# Altium PCB NFC_Access_R00.PcbDoc (part 1 of 2)
Units mm, origin at the board's own origin, x right, y up, seen from the top; angles counter-clockwise.
Board outline 145 x 60 mm, 2 copper layers (Top Layer, Bottom Layer); 109 components, 94 nets, 438 pads, 146 vias.
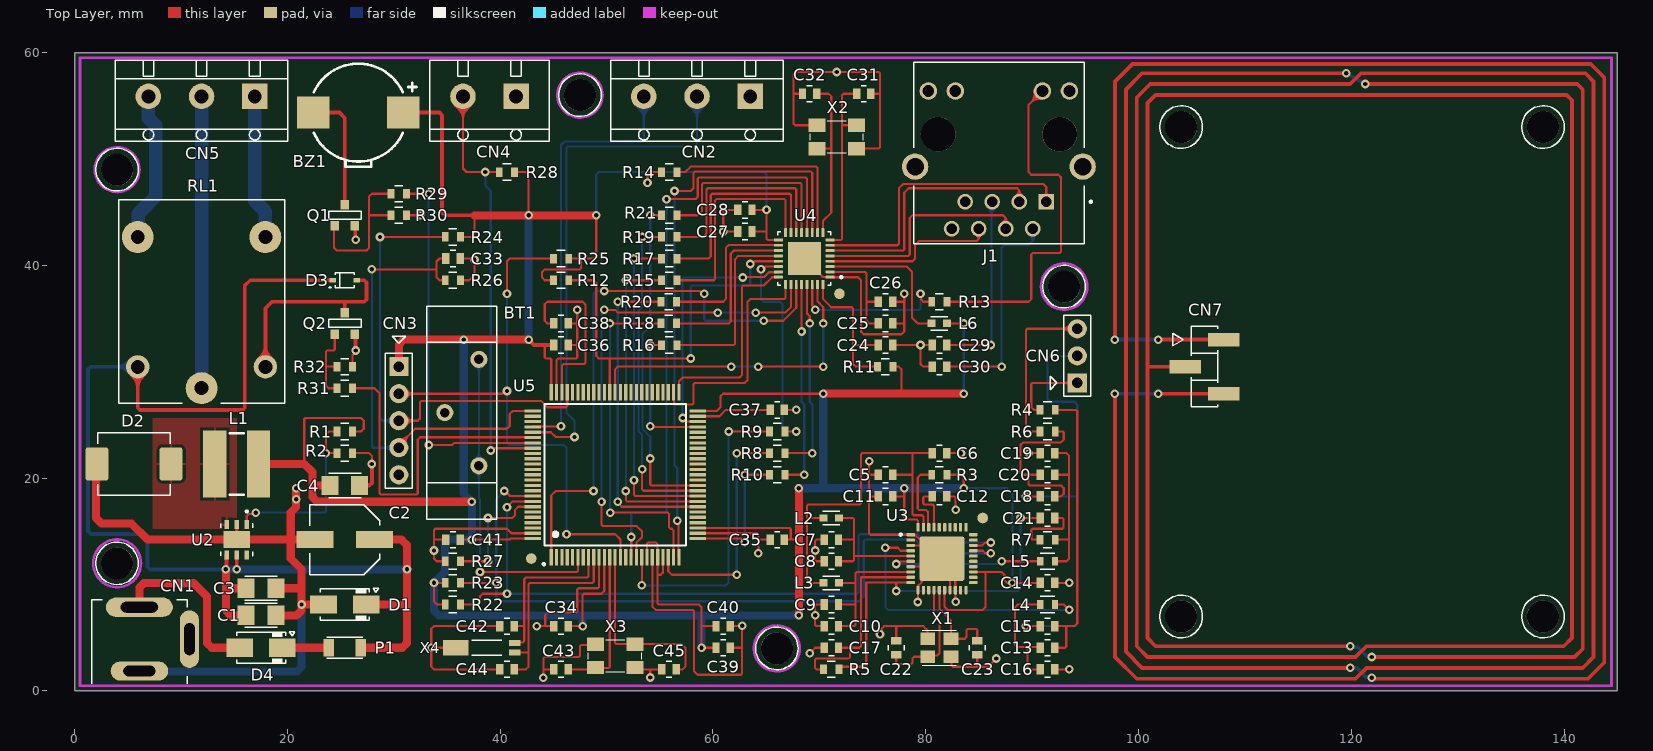
[diagram p0: Top Layer view]
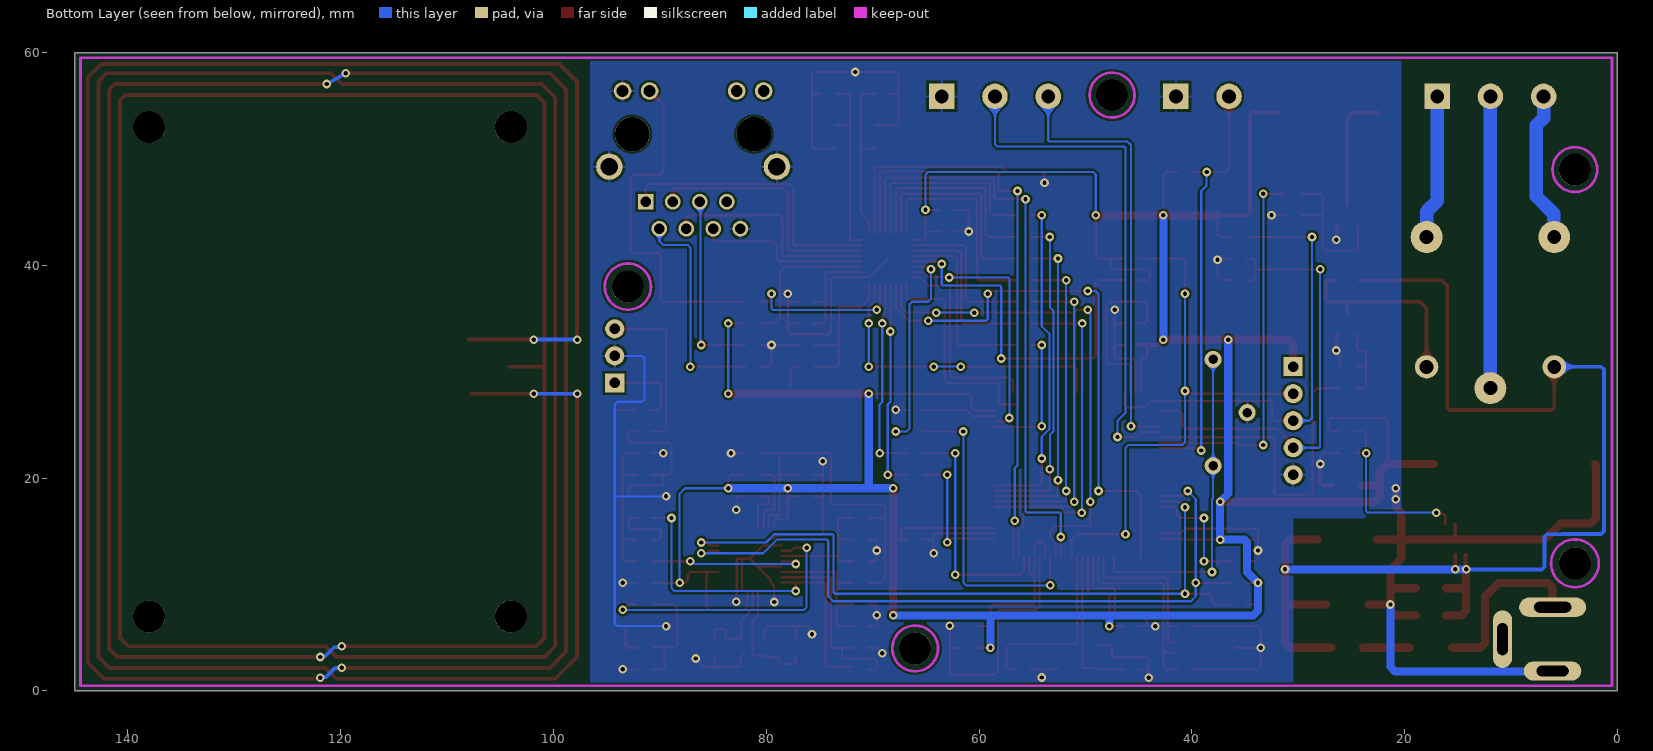
[diagram p1: Bottom Layer view, seen from below]

## Layer stack, top to bottom
Top Solder: solder mask 0.0102, Solder Resist, Dk 3.5
Top Layer: signal copper 0.0356
Dielectric 1: dielectric 0.32, FR-4, Dk 4.8
Bottom Layer: signal copper 0.0356
Bottom Solder: solder mask 0.0102, Solder Resist, Dk 3.5

## Board outline
0,0 0,60 145,60 145,0

## Design rules (kind name [scope] priority, off if disabled: settings)
Clearance [All] p1: gap=0.203 ignorepadtopadclearanceinfootprint=FALSE except(0: Arc-Hole Track-Hole SMDPad-Hole THPad-Hole Via-Hole Fill-Hole Poly-Hole Region-Hole Text-Hole; 0.178: Arc-SMDPad Track-SMDPad SMDPad-SMDPad)
HoleSize [All] p1: absolutevalues=TRUE maxlimit=3.81 minlimit=0.025 maxpercent=80.000 minpercent=20.000
MinimumSolderMaskSliver [All] p1: minsoldermaskwidth=0
PolygonConnect PolygonConnect_1 [All] p1: thpad.connectstyle=Relief thpad.reliefconductorwidth=0.254 thpad.reliefentries=4 thpad.polygonreliefangle="90 Angle" thpad.airgapwidth=0.254 smdpad.connectstyle=Relief smdpad.reliefconductorwidth=0.254 smdpad.reliefentries=4 smdpad.polygonreliefangle="90 Angle" smdpad.airgapwidth=0.254 via.connectstyle=Direct via.reliefconductorwidth=0.254 via.reliefentries=4 via.polygonreliefangle="90 Angle" via.airgapwidth=0.254
RoutingVias [All] p1: holewidth=0.406 width=0.813 viastyle="Through Hole" minholewidth=0.406 minwidth=0.813 maxholewidth=0.711 maxwidth=1.27
SilkToSolderMaskClearance [IsPad] p1: minsilkscreentomaskgap=0.076 clearancetoexposedcopper=TRUE
SolderMaskExpansion [All] p1: expansion=0.102 istentingtop=FALSE
Width [All] p1: maxlimit=1.27 minlimit=0.203 preferedwidth=0.203
27 further rules are at their usual default settings.

## Classes and differential pairs
component class Designator: BZ1 CN4 CN5 D3 Q1 Q2 R28 R29 R30 R31 R32 RL1

## Components (designator, comment, footprint, x,y, rotation, side; value= is the part's Value field where it differs from the comment)
BT1 "S8401-46" S8401-46 34.798,26.162 r90 top locked
BZ1 "SMTB-0927-TW-R" SMTB-0927-TW-R 26.67,54.356 r270 top
C1 "100nF 50V C0G" C_1206 17.526,7.112 r0 top
C2 "100uF 25V Elect" CAP_ELECT_6.3_7.7 25.4,14.224 r180 top
C3 "10uF 25V X5R" C_1206 17.526,9.652 r0 top
C4 "22uF 6.3V X5R" C_1206 25.4,19.304 r0 top
C5 "100nF 25V X7R" C_0603 76.2,20.32 r180 top
C6 "100nF 25V X7R" C_0603 81.28,22.352 r0 top
C7 "10uF 6.3V X5R" C_0603 71.12,14.224 r0 top
C8 "100nF 25V X7R" C_0603 71.12,12.192 r180 top
C9 "10uF 6.3V X5R" C_0603 71.12,8.128 r0 top
C10 "100nF 25V X7R" C_0603 71.12,6.096 r180 top
C11 "100nF 25V X7R" C_0603 76.2,18.288 r180 top
C12 "10uF 6.3V X5R" C_0603 81.28,18.288 r0 top
C13 "22pF 50V C0G" C_0603 91.44,4.064 r180 top
C14 "100nF 25V X7R" C_0603 91.44,10.16 r0 top
C15 "100pF 50V X7R" C_0603 91.44,6.096 r180 top
C16 "220pF 50V X7R" C_0603 91.44,2.032 r0 top
C17 "100nF 25V X7R" C_0603 71.12,4.064 r180 top
C18 "100pF 50V X7R" C_0603 91.44,18.288 r0 top
C19 "220pF 50V X7R" C_0603 91.44,22.352 r0 top
C20 "22pF 50V C0G" C_0603 91.44,20.32 r0 top
C21 "1000pF 50V X7R" C_0603 91.44,16.256 r0 top
C22 "33pF 50V C0G" C_0603 77.216,4.064 r90 top
C23 "33pF 50V C0G" C_0603 84.836,4.064 r270 top
C24 "100nF 50V X7R" C_0603 76.2,32.512 r0 top
C25 "100nF 50V X7R" C_0603 76.2,34.544 r0 top
C26 "2.2uF 6.3V X5R" C_0603 76.2,36.576 r0 top
C27 "100nF 50V X7R" C_0603 62.992,43.18 r180 top
C28 "22uF 6.3V X5R" C_0603 62.992,45.212 r180 top
C29 "100nF 50V X7R" C_0603 81.28,32.512 r180 top
C30 "100nF 50V X7R" C_0603 81.28,30.48 r180 top
C31 "22pF 100V C0G" C_0603 74.168,56.134 r0 top
C32 "22pF 100V C0G" C_0603 69.088,56.134 r180 top
C33 "100nF 50V X7R" C_0603 35.56,40.64 r0 top
C34 "100nF 50V X7R" C_0603 45.72,6.096 r180 top
C35 "100nF 50V X7R" C_0603 66.04,14.224 r180 top
C36 "100nF 50V X7R" C_0603 45.72,32.512 r0 top
C37 "2.2uF 6V3 X5R" C_0603 66.04,26.416 r0 top
C38 "2.2uF 6V3 X5R" C_0603 45.72,34.544 r0 top
C39 "100nF 50V X7R" C_0603 60.96,4.064 r180 top
C40 "10uF 25V X5R" C_0603 60.96,6.096 r0 top
C41 "100nF 50V X7R" C_0603 35.56,14.224 r180 top
C42 "4.7pF 50V C0G" C_0603 40.64,6.096 r180 top
C43 "22pF 50V C0G" C_0603 45.72,2.032 r180 top
C44 "4.7pF 50V C0G" C_0603 40.64,2.032 r180 top
C45 "22pf 50V C0G" C_0603 55.88,2.032 r180 top
CN1 "PJ-002BH" PJ002B 6.096,7.874 r270 top
CN2 "OSTTC030162 Bornera 3Vias 5mm" TERMINALBLOCK_1X3_P5MM 58.5,55.88 r180 top
CN3 "TSW-105-07-F-S" "HEADER_M_1X5_0.1\"" 30.48,25.4 r270 top
CN4 "OSTTC020162 Bornera 2Vias 5mm" TERMINALBLOCK_1X2_P5MM 39,55.88 r180 top
CN5 "OSTTC030162 Bornera 3Vias 5mm" TERMINALBLOCK_1X3_P5MM 11.938,55.88 r180 top
CN6 "TSW-103-07-F-S" HEADER_M_1X3_0.1 94.234,31.496 r90 top
CN7 "TSM-103-01-L-SV-P-TR" "HEADER_M_1X3_0.1\"_SMD" 107.994,33.02 r270 top
D1 "SMAJ30A" D_SMA 25.4,8.128 r0 top
D2 "STPS3L40" D_214 5.588,21.336 r0 top
D3 "1N4148WS" SOD_323 25.4,38.608 r180 top
D4 "S1G" D_SMA 17.526,4.064 r0 top
J1 "ARJC02-111008B" ARJC02-111008B 86.869,52.326 r180 top
L1 "744053003" 744053003 15.24,21.336 r0 top
L2 "HZ0603A252R-10" F_0603 71.12,16.256 r0 top
L3 "HZ0603A252R-10" F_0603 71.12,10.16 r0 top
L4 "560nH" I_0603 91.44,8.128 r0 top
L5 "560nH" I_0603 91.44,12.192 r180 top
L6 "HZ0603A252R-10" F_0603 81.28,34.544 r180 top
P1 "NANOSMDC012F-2" NANOSMDC 25.4,4.064 r0 top
Q1 "IRLML0040TRPBF" SOT_23 25.4,44.704 r90 top
Q2 "IRLML0040TRPBF" SOT_23 25.4,34.544 r90 top
R1 "40K2 1%" R_0603 25.4,24.384 r0 top
R2 "13K 1%" R_0603 25.4,22.352 r180 top
R3 "10K 5%" R_0603 81.28,20.32 r180 top
R4 "1.5 5%" R_0603 91.44,26.416 r0 top
R5 "10K 5%" R_0603 71.12,2.032 r0 top
R6 "1.5 5%" R_0603 91.44,24.384 r0 top
R7 "1K69 1%" R_0603 91.44,14.224 r0 top
R8 "33 5%" R_0603 66.04,22.352 r180 top
R9 "33 5%" R_0603 66.04,24.384 r180 top
R10 "33 5%" R_0603 66.04,20.32 r180 top
R11 "10K 5%" R_0603 76.2,30.48 r180 top
R12 "4K7 5%" R_0603 45.72,38.608 r0 top
R13 "330 5%" R_0603 81.28,36.576 r0 top
R14 "6K49 1%" R_0603 55.88,48.768 r180 top
R15 "33 5%" R_0603 55.88,38.608 r180 top
R16 "33 5%" R_0603 55.88,32.512 r180 top
R17 "33 5%" R_0603 55.88,40.64 r180 top
R18 "33 5%" R_0603 55.843,34.544 r180 top
R19 "33 5%" R_0603 55.88,42.672 r180 top
R20 "33 5%" R_0603 55.843,36.576 r180 top
R21 "33 5%" R_0603 55.88,44.704 r180 top
R22 "10K 5%" R_0603 35.56,8.128 r180 top
R23 "10K 5%" R_0603 35.56,10.16 r180 top
R24 "10K 5%" R_0603 35.56,42.672 r180 top
R25 "10K 5%" R_0603 45.72,40.64 r180 top
R26 "10K 5%" R_0603 35.56,38.608 r0 top
R27 "10K 5%" R_0603 35.56,12.192 r0 top
R28 "10K 5%" R_0603 40.64,48.768 r0 top
R29 "1K 5%" R_0603 30.48,46.736 r0 top
R30 "10K 5%" R_0603 30.48,44.704 r180 top
R31 "1K 5%" R_0603 25.4,28.448 r0 top
R32 "10K 5%" R_0603 25.4,30.48 r180 top
RL1 "G5LE-1A4 DC12" G5LE-1 11.938,35.56 r90 top
U2 "ST1S03APUR" 6-VDFN 15.24,14.224 r270 top
U3 "PN5321A3HN" QFN40G-0.5-6X6MM 81.522,12.434 r0 top
U4 "KSZ8091MNX" QFN32 68.58,40.64 r180 top
U5 "STM32F407VGT6" LQFP100 50.8,20.32 r90 top locked
X1 "7M-27.120MAAJ-T" 7M-4-SMD 81.28,4.064 r180 top
X2 "ABM3C-25.000MHZ-D4Y-T" ABM3C 71.628,52.07 r0 top
X3 "ECS-80-10-30B-CKM-TR" ABM3C 50.8,3.302 r0 top
X4 "AB26TRQ-32.768KHZ-T" AB26TQF 38.608,4.064 r0 top

## Footprints (in the part's own frame and the unit in brackets; to place one, negate y for a bottom-side part, rotate by r counter-clockwise, add the part's x,y. Pads: shape width x height; smd on the part's side, far side on the other; paste and mask are expansions set on the pad)
6-VDFN [mm]
  rect 0.84x0.42 smd: 1(-1.435,0.95) 2(-1.435,0) 3(-1.435,-0.95) 4(1.435,-0.95) 5(1.435,0) 6(1.435,0.95)
  rect 1.6x2.5 smd paste-2: 7(0,0)
  silkscreen extent -2.75,-1.5 1.5,1.5, body extent -1.5,-1.5 1.5,1.5, height 0.54
7M-4-SMD [mm]
  rect 1.4x1.2 smd: 1(-1.1,-0.85) 2(1.1,-0.85) 3(1.1,0.85) 4(-1.1,0.85)
  silkscreen extent -1.6,-1.65 1.6,1.65
744053003 [mm]
  rect 2.2x6.3 smd: 1(-2.05,0) 2(2.05,0)
  silkscreen extent -0.64,-2.9 0.64,2.9
AB26TQF [mm]
  rect 1.1x0.6 smd: 1(2.775,-0.45) 2(2.775,0.45)
  rect 2.4x1.5 smd: 3(-2.775,0)
  silkscreen extent -1.3,-0.73 1.55,0.72, body extent -3.88,-0.68 2.83,0.78, height 1.53
ABM3C [mm]
  rect 1.6x1.25 smd: 1(-1.85,-1.1) 2(1.85,-1.1) 3(1.85,1.1) 4(-1.85,1.1)
  silkscreen extent -2.5,-1.5 2.5,1.5, body extent -2.5,-1.6 2.5,1.6, height 1.3
ARJC02-111008B [mm] "CONN JACK 1PORT 100 BASE-TX PCB"
  rect 1.478x1.478 hole 0.97: 1(-4.445,6.35)
  round 1.478 hole 0.97: 2(-3.175,8.89) 3(-1.905,6.35) 4(-0.635,8.89) 5(0.635,6.35) 6(1.905,8.89) 7(3.175,6.35) 8(4.445,8.89)
  round 1.65 hole 1.1: 9(6.63,-4.06) 10(4.09,-4.06) 11(-4.09,-4.06) 12(-6.63,-4.06)
  round 2.475 hole 1.65: 13(-7.875,3.05) 14(7.875,3.05)
  round 3.26 hole 3.26 unplated: ""(-5.715,0) ""(5.715,0)
  silkscreen extent -8.74,-6.78 8,10.3
C_0603 [mm] "Chip Capacitor, 2-Leads, Body 2.00x1.25mm"
  rect 0.7x1 smd: 1(-0.675,0) 2(0.675,0)
  silkscreen extent -0.25,-0.76 0.25,0.76
C_1206 [mm]
  rect 1.6x1.8 smd: 1(-1.4,0) 2(1.4,0)
  silkscreen extent -1.52,-1.14 1.52,1.14, body extent -1.6,-0.8 1.6,0.8, height 1
CAP_ELECT_6.3_7.7 [mm]
  rect 3.5x1.6 smd: 1(-2.8,0) 2(2.8,0)
  silkscreen extent -3.3,-3.3 3.3,3.3
D_214 [mm]
  rrect25% 2.18x3.12 smd: 1(-3.485,0) 2(3.485,0)
  silkscreen extent -3.43,-2.95 3.43,2.95, body extent -3.97,-2.95 3.97,2.95, height 1.21
D_SMA [mm]
  rect 2.5x1.7 smd: 1(-2,0) 2(2,0)
  silkscreen extent -2.3,-1.52 3.17,1.52, body extent -2.74,-1.4 2.74,1.4, height 2.39
F_0603 [mm] "Ferrite Bead"
  rect 0.75x0.7 smd: 1(-0.725,0) 2(0.725,0)
  silkscreen extent -0.8,-0.64 0.8,0.64
G5LE-1 [mm]
  round 2.2 hole 1.3: 1(-5.1,6) 2(-5.1,-6)
  round 3 hole 1.3: 3(-7.1,0) 4(7.1,6) 5(7.1,-6)
  silkscreen extent -8.5,-7.8 10.6,7.8, body extent -8.5,-7.75 10.5,7.75, height 15.3
HEADER_M_1X3_0.1 [mm] "Header Male 1 x 3 Vias Pitch 100mils"
  rect 1.8x1.8 hole 1: 1(-2.54,0)
  round 1.8 hole 1: 2(0,0) 3(2.54,0)
  silkscreen extent -3.81,-1.27 3.81,2.54
"HEADER_M_1X3_0.1\"_SMD" [mm]
  rect 1.27x2.96 smd: 1(0,0) 2(2.54,-3.6) 3(5.08,0)
  silkscreen extent -1.25,-4.78 6.33,-0.55
"HEADER_M_1X5_0.1\"" [mm] "Header Male 1 x 5 Vias Pitch 100mils"
  rect 1.8x1.8 hole 1: 1(-5.08,0)
  round 1.8 hole 1: 2(-2.54,0) 3(0,0) 4(2.54,0) 5(5.08,0)
  silkscreen extent -7.94,-1.27 6.35,1.27, body extent -6.35,-1.27 6.35,1.27, height 8.87
I_0603 [mm]
  rect 0.6x0.8 smd: 1(-0.7,0) 2(0.7,0)
  silkscreen extent -0.7,-0.76 0.7,0.76
LQFP100 [mm]
  rect 1.55x0.3 smd: 1(-7.75,6) 2(-7.75,5.5) 3(-7.75,5) 4(-7.75,4.5) 5(-7.75,4) 6(-7.75,3.5) 7(-7.75,3) 8(-7.75,2.5) 9(-7.75,2) 10(-7.75,1.5) 11(-7.75,1) 12(-7.75,0.5) 13(-7.75,0) 14(-7.75,-0.5) 15(-7.75,-1) 16(-7.75,-1.5) 17(-7.75,-2) 18(-7.75,-2.5) 19(-7.75,-3) 20(-7.75,-3.5) 21(-7.75,-4) 22(-7.75,-4.5) 23(-7.75,-5) 24(-7.75,-5.5) 25(-7.75,-6) 51(7.75,-6) 52(7.75,-5.5) 53(7.75,-5) 54(7.75,-4.5) 55(7.75,-4) 56(7.75,-3.5) 57(7.75,-3) 58(7.75,-2.5) 59(7.75,-2) 60(7.75,-1.5) 61(7.75,-1) 62(7.75,-0.5) 63(7.75,0) 64(7.75,0.5) 65(7.75,1) 66(7.75,1.5) 67(7.75,2) 68(7.75,2.5) 69(7.75,3) 70(7.75,3.5) 71(7.75,4) 72(7.75,4.5) 73(7.75,5) 74(7.75,5.5) 75(7.75,6)
  rect 0.3x1.55 smd: 26(-6,-7.75) 27(-5.5,-7.75) 28(-5,-7.75) 29(-4.5,-7.75) 30(-4,-7.75) 31(-3.5,-7.75) 32(-3,-7.75) 33(-2.5,-7.75) 34(-2,-7.75) 35(-1.5,-7.75) 36(-1,-7.75) 37(-0.5,-7.75) 38(0,-7.75) 39(0.5,-7.75) 40(1,-7.75) 41(1.5,-7.75) 42(2,-7.75) 43(2.5,-7.75) 44(3,-7.75) 45(3.5,-7.75) 46(4,-7.75) 47(4.5,-7.75) 48(5,-7.75) 49(5.5,-7.75) 50(6,-7.75) 76(6,7.75) 77(5.5,7.75) 78(5,7.75) 79(4.5,7.75) 80(4,7.75) 81(3.5,7.75) 82(3,7.75) 83(2.5,7.75) 84(2,7.75) 85(1.5,7.75) 86(1,7.75) 87(0.5,7.75) 88(0,7.75) 89(-0.5,7.75) 90(-1,7.75) 91(-1.5,7.75) 92(-2,7.75) 93(-2.5,7.75) 94(-3,7.75) 95(-3.5,7.75) 96(-4,7.75) 97(-4.5,7.75) 98(-5,7.75) 99(-5.5,7.75) 100(-6,7.75)
  silkscreen extent -8.54,-6.65 6.65,6.84
NANOSMDC [mm]
  rect 1x1.6 smd: 1(-1.5,0) 2(1.5,0)
  silkscreen extent -1.7,-1 1.7,1, body extent -1.6,-0.8 1.6,0.8, height 1
PJ002B [mm]
  oval 1.8x6.3 hole 1 slot 3.5 at 90 deg: 1(0,0)
  oval 1.8x5.4 hole 1 slot 3 at 90 deg: 2(6,0)
  oval 5.4x1.8 hole 1 slot 3 at 0 deg: 3(3,4.7)
  silkscreen extent -0.7,-4.5 7.2,4.5, body extent -0.7,-4.7 13.7,4.7, height 11.05
QFN32 [mm]
  rrect25% 0.84x0.27 smd: 1(-2.435,1.75) 2(-2.435,1.25) 3(-2.435,0.75) 4(-2.435,0.25) 5(-2.435,-0.25) 6(-2.435,-0.75) 7(-2.435,-1.25) 8(-2.435,-1.75) 17(2.435,-1.75) 18(2.435,-1.25) 19(2.435,-0.75) 20(2.435,-0.25) 21(2.435,0.25) 22(2.435,0.75) 23(2.435,1.25) 24(2.435,1.75)
  rrect25% 0.27x0.84 smd: 9(-1.75,-2.435) 10(-1.25,-2.435) 11(-0.75,-2.435) 12(-0.25,-2.435) 13(0.25,-2.435) 14(0.75,-2.435) 15(1.25,-2.435) 16(1.75,-2.435) 25(1.75,2.435) 26(1.25,2.435) 27(0.75,2.435) 28(0.25,2.435) 29(-0.25,2.435) 30(-0.75,2.435) 31(-1.25,2.435) 32(-1.75,2.435)
  rect 3.1x3.1 smd paste-0.57: 33(0,0)
  silkscreen extent -3.57,-2.5 2.5,2.5, body extent -2.5,-2.5 2.5,2.5, height 0.8
QFN40G-0.5-6X6MM [mm]
  rrect50% 0.8x0.3 smd: 1(-2.95,2.25) 2(-2.95,1.75) 3(-2.95,1.25) 4(-2.95,0.75) 5(-2.95,0.25) 6(-2.95,-0.25) 7(-2.95,-0.75) 8(-2.95,-1.25) 9(-2.95,-1.75) 10(-2.95,-2.25) 21(2.95,-2.25) 22(2.95,-1.75) 23(2.95,-1.25) 24(2.95,-0.75) 25(2.95,-0.25) 26(2.95,0.25) 27(2.95,0.75) 28(2.95,1.25) 29(2.95,1.75) 30(2.95,2.25)
  rrect50% 0.3x0.8 smd: 11(-2.25,-2.95) 12(-1.75,-2.95) 13(-1.25,-2.95) 14(-0.75,-2.95) 15(-0.25,-2.95) 16(0.25,-2.95) 17(0.75,-2.95) 18(1.25,-2.95) 19(1.75,-2.95) 20(2.25,-2.95) 31(2.25,2.95) 32(1.75,2.95) 33(1.25,2.95) 34(0.75,2.95) 35(0.25,2.95) 36(-0.25,2.95) 37(-0.75,2.95) 38(-1.25,2.95) 39(-1.75,2.95) 40(-2.25,2.95)
  rrect10% 4.2x4.2 smd: 41(0,0)
  silkscreen extent -3.96,2.18 -3.81,2.34
R_0603 [mm] "Chip Resistor, 2-Leads, Body 2.00x1.25mm, IPC Low Density"
  rect 0.65x0.9 smd: 1(-0.725,0) 2(0.725,0)
  silkscreen extent -0.38,-0.76 0.38,0.76
S8401-46 [mm]
  round 1.6 hole 0.9: 1(0,0) 2(-5,-3.2) 2(5,-3.2)
  silkscreen extent -10,-4.9 10,1.7
SMTB-0927-TW-R [mm] "3V3 Active Buzzer"
  rect 3x3.05 smd: 1(0,4.225) 2(0,-4.225)
  silkscreen extent -4.6,-4.19 5.1,5.46
SOD_323 [mm]
  rect 0.59x0.45 smd: 1(-1.125,0) 2(1.125,0)
  silkscreen extent -0.9,-0.7 1.51,0.72, body extent -1.28,-0.63 1.23,0.63, height 0.9
SOT_23 [mm]
  rect 0.9x0.8 smd: 1(-1,0.95) 2(-1,-0.95) 3(1,0)
  silkscreen extent -0.38,-1.52 0.38,1.52, body extent -1.19,-1.48 1.31,1.52, height 1.09
TERMINALBLOCK_1X2_P5MM [mm]
  rect 2.4x2.4 hole 1.3: 1(-2.5,0)
  round 2.4 hole 1.3: 2(2.5,0)
  silkscreen extent -5.6,-3.4 5.6,4.2
TERMINALBLOCK_1X3_P5MM [mm]
  rect 2.4x2.4 hole 1.3: 1(-5,0)
  round 2.4 hole 1.3: 2(0,0) 3(5,0)
  silkscreen extent -8.1,-3.4 8.1,4.2, body extent -8.08,-3.43 7.43,4.18, height 10

## Part data
BT1: library part CR2032, "BATT HLDR COIN 20MM 1 CEL PC PIN / 952-1743-2-ND"
BZ1: library part Buzzer, "3V3 Active Buzzer / 668-SMTB-0927-TW-RTR-ND"
C1: library part "Ceramic capacitor", "Ceramic Capacitor / MNF: GRM31C5C1H104JA01L / DGK: 490-6505-2-ND"
C2: library part "Pol capacitor", "Polarized Capacitor / 732-8438-2-ND"
C3: library part "Ceramic capacitor", "Ceramic Capacitor / MNF:GRM31CR61E106KA12L / DGK:490-3373-2-ND"
C4: library part "Ceramic capacitor", "Ceramic Capacitor / MNF: GRM31CR60J226KE19L / DGK: 490-1824-2-ND"
C5 C6 C8 C10 C11 C14 C17 C21 C24 C25 C27 C29 C30 C33 C34 C35 C36 C39 C41: library part "Ceramic capacitor", "Ceramic Capacitor / 1276-1018-2-ND"
C7 C9 C12: library part "Ceramic capacitor", "Ceramic Capacitor / 1276-1119-2-ND"
C13 C20 C43 C45: library part "Ceramic capacitor", "Ceramic Capacitor / 1276-2228-2-ND"
C15 C18: library part "Ceramic capacitor", "Ceramic Capacitor / 1276-1908-2-ND"
C16 C19: library part "Ceramic capacitor", "Ceramic Capacitor / 1276-1986-2-ND"
C22 C23: library part "Ceramic capacitor", "Ceramic Capacitor / 1276-1070-2-ND"
C26 C37 C38: library part "Ceramic capacitor", "Ceramic Capacitor / 1276-1183-2-ND"
C28: library part "Ceramic capacitor", "Ceramic Capacitor / 1276-1193-2-ND"
C31 C32: library part "Ceramic capacitor", "Ceramic Capacitor / 490-4942-2-ND"
C40: library part "Ceramic capacitor", "Ceramic Capacitor / MNF:GRM31CR61E106KA12L / DGK:1276-1869-2-ND"
C42 C44: library part "Ceramic capacitor", "Ceramic Capacitor / 1276-1792-2-ND"
CN1: library part CN_PowerJack, "Barrel Power Connector / CP-002BH-ND"
CN2 CN5: library part CONN_03P, "TERM BLK 3POS SIDE ENTRY 5MM PCB / ED2601-ND"
CN3: library part CONN_05P, "CONN HEADER VERT 5POS 2.54MM / SAM10336-ND"
CN4: library part CONN_02P, "TERM BLK 2POS SIDE ENTRY 5MM PCB / ED2600-ND"
CN6: library part CONN_03P, "CONN HEADER VERT 3POS 2.54MM / SAM8995-ND"
CN7: library part CONN_03P, "CONN HEADER SMD 3POS 2.54MM / SAM13281TR-ND"
D1: library part DIODE_TVS, "Unidirectional TVS / SMAJ30ABTR-ND"
D2: library part DIODO_SH, "Diode Shottky / 497-4673-2-ND"
D3: library part DIODO_SH, "DIODE GEN PURP 75V 300MA SOD323 / 1655-1N4148WSTR-ND"
D4: library part DIODO_SH, "Diode Shottky / 1655-S1GTR-ND"
J1: library part SI-46001-F, "RJ45 with Magentics / 535-12605-ND"
L1: library part IND, "FIXED IND 3UH 2.8A 30 MOHM SMD / 732-1037-2-ND"
L2 L3 L6: library part FERRITE, "Ferrite Bead / 240-2561-2-ND"
L4 L5: library part IND, "FIXED IND 560NH 450MA 480MOHM SM / 490-LQW18CNR56J0ZDTR-ND"
P1: library part PLYSW, "Polyswitch / NANOSMDC012F-2TR-ND"
Q1 Q2: library part N_MOSFET_SOT23, "Mosfet N-Ch / IRLML0040TRPBFTR-ND"
R1: library part Res1, "Resistor / CR0603-FX-4022ELFTR-ND"
R2: library part Res1, "Resistor / CR0603-FX-1302ELFTR-ND"
R3 R5: library part Res1, "Resistor"
R4 R6: library part Res1, "Resistor SMD 0603 / CR0603-J/-1R5ELFTR-ND"
R7: library part Res1, "Resistor / CR0603-FX-1691ELFTR-ND"
R8 R9 R10 R15 R16 R17 R18 R19 R20 R21: library part Res1, "Resistor / 118-CR0603-JW-330ELFTR-ND"
R11 R22 R23 R24 R25 R26 R27 R28 R30 R32: library part Res1, "Resistor / CR0603-JW-103ELFTR-ND"
R12: library part Res1, "Resistor / CR0603-JW-472ELFTR-ND"
R13: library part Res1, "Resistor / CR0603-JW-331ELFTR-ND"
R14: library part Res1, "Resistor / CR0603-FX-6491ELFTR-ND"
R29 R31: library part Res1, "Resistor / CR0603-JW-102ELFTR-ND"
RL1: library part "RELAY SPDT", "RELAY GEN PURPOSE SPST 10A 12V / Z2352-ND"
U2: library part ST1S03, "IC REG BUCK ADJUSTABLE 1.5A / 497-6902-2-ND"
U3: library part PN532, "NFC Controller / 568-13228-ND"
U4: "IC TRANSCEIVER FULL 1/1 32QFN / KSZ8091MNXIA-TR-ND"
U5: library part STM32F407, "Cortex M4 32bit CPU / 497-11605-ND"
X1: library part CRYSTAL_4P, "Crystal 4 Vias + GND 27.12 MHz / 887-1424-2-ND"
X2: library part CRYSTAL_4P, "Crystal 4 Vias + GND 25.00MHz / 535-11296-2-ND"
X3: library part CRYSTAL_4P, "Crystal 4 Vias + GND 8 MHz / 50-ECS-80-10-30B-CKM-TR-ND"
X4: library part "CRYSTAL 3P", "Crystal 2 Vias + GND 32.768 kHz / 535-12051-2-ND"

## Free pads (board coordinates)
  round 3 hole 3 unplated paste+0 mask+0.102: ""(4,12) ""(4,49) ""(47.5,56) ""(66,4) ""(93,38) ""(104,7) ""(104,53) ""(138,7) ""(138,53)
  round 1 smd paste-0.5 mask+0.5: ""(42.926,12.446) ""(71.882,37.338) ""(85.344,16.256)

## Via types
v1: diameter 0.813, hole 0.406, Top Layer to Bottom Layer, tented both sides, 146 vias

## Nets (pads, with @x,y where several pads share a name; then routed paths per layer and width w, separated by ;. In a path a pad name is that pad's centre, name@x,y a point inside that pad or via, vN(x,y) a via of type N, cw(c..) or ccw(c..) an arc to the next point about the centre after c; other vN are vias at no path point)
1V2: C25.1 C26.1 U4.2 | length 10.2
  Top Layer w0.203: U4.2@71.015,39.39 74.303,39.39 74.422,39.271 74.422,36.576 ; C25.1@75.525,34.544 74.676,34.544 74.422,34.798 74.422,36.576 ; C26.1@75.525,36.576 74.422,36.576
3V3: BZ1.1 C4.1 C11.1 C14.1 C27.1 C28.1 C34.1 C35.1 C36.1 C39.2 C40.1 C41.1 CN3.1 L1.2 L6.1 R1.2 R3.1 R11.1 R12.1 R22.2 R23.2 R24.1 R25.1 R28.2 U3.16 U3.23 U3.40 U4.17 U5.11 U5.19 U5.21 U5.22 U5.28 U5.50 U5.75 U5.100 | length 378.6
  Top Layer w0.203: 21.59,21.336 21.59,25.535 21.709,25.654 26.924,25.654 27.178,25.4 27.178,24.638 26.924,24.384 R1.2@26.125,24.384 ; 22.352,19.4 22.448,19.304 ; R22.2@34.835,8.128 34.036,8.128 33.782,8.382 v1(33.782,10.16) R23.2@34.835,10.16 ; C41.1@36.235,14.224 v1(37.338,14.224) 40.894,14.224 40.99,14.32 U5.100@43.05,14.32 ; R24.1@36.285,42.672 37.338,42.672 37.592,42.926 37.592,44.704 ; R28.2@41.365,48.768 42.418,48.768 42.672,48.514 v1(42.672,44.704) ; 44.315,32.512 44.196,32.393 44.196,31.361 44.315,31.242 44.681,31.242 44.8,31.123 U5.75@44.8,28.07 ; R12.1@44.995,38.608 44.196,38.608 43.942,38.862 43.942,39.37 44.196,39.624 47.487,39.624 47.607,39.743 47.607,40.64 ; C34.1@46.395,6.096 v1(47.752,6.096) 47.752,9.025 47.871,9.144 49.53,9.144 49.784,9.398 49.784,12.554 U5.11@49.8,12.57 ; R25.1@46.445,40.64 47.607,40.64 ; v1(49.022,44.704) 49.022,40.894 48.768,40.64 47.607,40.64 ; U5.19@53.8,12.57 53.8,13.851 53.919,13.97 54.61,13.97 54.8,13.78 U5.21@54.8,12.57 54.8,10.922 ; U5.22@55.3,12.57 55.3,11.128 55.094,10.922 54.8,10.922 ; U5.28@58.55,15.32 67.191,15.32 67.31,15.201 67.31,14.224 ; U5.50@58.55,26.32 60.356,26.32 60.706,26.67 60.706,27.686 60.96,27.94 v1(70.358,27.94) ; v1@58.928,4.318 58.928,6.096 ; v1@59.182,4.064 C39.2@60.285,4.064 ; C40.1@60.285,6.096 58.928,6.096 ; C27.1@63.667,43.18 65.024,43.18 ; C28.1@63.667,45.212 v1(65.024,45.212) 65.024,43.18 ; U4.17@66.145,42.39 65.143,42.39 65.024,42.509 65.024,43.18 ; C35.1@66.715,14.224 67.31,14.224 ; 67.968,14.224 67.31,14.224 ; C11.1@76.875,18.288 77.978,18.288 ; R11.1@76.925,30.48 77.47,30.48 77.724,30.226 77.724,27.94 ; v1(77.978,19.05) 77.978,18.288 ; U3.40@79.272,15.384 79.272,15.985 79.153,16.104 78.13,16.104 77.978,16.256 77.978,18.288 ; U3.16@81.772,9.484 81.772,7.89 82.042,7.62 85.344,7.62 85.598,7.874 85.598,11.184 ; R3.1@82.005,20.32 83.312,20.32 83.566,20.066 v1(83.566,19.05) ; L6.1@82.005,34.544 v1(83.566,34.544) ; U3.23@84.472,11.184 85.598,11.184 ; C14.1@90.765,10.16 v1(88.138,10.16) 87.63,10.16 87.376,10.414 87.376,10.938 87.13,11.184 85.598,11.184 ; 54.8,10.922 54.8,8.247 54.919,8.128 58.674,8.128 58.928,7.874 58.928,6.096
  Top Layer w0.356: BZ1.1@31.911,54.356 34.29,54.356 34.544,54.102 34.544,44.958 34.798,44.704 37.592,44.704 ; v1(42.672,33.02) 43.18,32.512 44.315,32.512 C36.1@45.045,32.512
  Top Layer w0.762: L1.2@17.29,21.336 21.59,21.336 22.352,20.574 22.352,19.4 22.352,18.226 22.798,17.78 v1(37.338,17.78) ; 22.448,19.304 C4.1@24,19.304 ; CN3.1@30.48,30.48 30.48,32.574 30.926,33.02 v1(36.576,33.02) v1(42.672,33.02) ; 37.592,44.704 v1(42.672,44.704) v1(49.022,44.704) ; v1(68.072,7.112) v1(68.072,19.05) ; v1(70.358,27.94) 77.724,27.94 v1(83.566,27.94)
  Bottom Layer w0.203: v1(49.022,44.704) 49.022,48.514 49.276,48.768 64.77,48.768 65.024,48.514 v1(65.024,45.212) ; v1(83.566,19.05) 87.63,19.05 88.138,18.542 v1(88.138,10.16) ; v1(83.566,27.94) v1(83.566,34.544)
  Bottom Layer w0.762: v1(36.576,33.02) 36.576,18.542 v1(37.338,17.78) v1(37.338,14.224) 35.052,14.224 34.798,13.97 34.798,11.176 v1(33.782,10.16) 33.782,7.558 34.228,7.112 47.56,7.112 47.752,6.92 ; v1(42.672,33.02) v1(42.672,44.704) ; v1(47.752,6.096) 47.752,6.92 ; v1(58.928,4.064) 58.928,6.858 58.674,7.112 ; v1(68.072,7.112) 58.674,7.112 ; v1(68.072,19.05) 70.358,19.05 ; v1(70.358,27.94) 70.358,19.05 ; v1(83.566,19.05) v1(77.978,19.05) 70.358,19.05 ; 47.752,6.92 47.752,7.112 58.674,7.112
12V: C1.1 C2.1 C3.1 D1.2 D3.2 P1.2 RL1.1 U2.4 U2.5 | length 118.5
  Top Layer w0.356: RL1.1@5.938,30.46 5.938,26.624 6.146,26.416 15.794,26.416 16.002,26.624 16.002,38.1 16.51,38.608 D3.2@24.275,38.608 ; v1@14.29,11.43 U2.4@14.29,12.789 ; v1(15.24,11.43) U2.5@15.24,12.789
  Top Layer w0.762: v1@14.224,11.364 14.224,9.652 ; C1.1@16.126,7.112 14.67,7.112 14.224,7.558 14.224,9.652 ; C3.1@16.126,9.652 14.224,9.652 ; P1.2@26.9,4.064 30.796,4.064 31.242,4.51 31.242,8.128 ; D1.2@27.4,8.128 31.242,8.128 ; C2.1@28.2,14.224 30.734,14.224 30.988,13.97 31.242,13.716 v1(31.242,11.43) 31.242,8.128
  Bottom Layer w0.356: RL1.1@5.938,30.46 5.918,30.48 1.524,30.48 1.27,30.226 1.27,15.027 1.544,14.752 5.14,14.752 5.16,14.732 6.604,14.732 6.858,14.478 6.858,11.684 7.112,11.43 v1(14.224,11.43)
  Bottom Layer w0.762: v1(14.224,11.43) v1(15.24,11.43) v1(31.242,11.43)
AVDD: C9.2 C10.1 L3.2 U3.8 | length 14.9
  Top Layer w0.203: C10.1@71.795,6.096 73.275,6.096 73.394,6.215 73.394,8.128 ; C9.2@71.795,8.128 73.394,8.128 ; L3.2@71.845,10.16 73.394,10.16 ; U3.8@78.572,11.184 73.513,11.184 73.394,11.065 73.394,10.16 ; 73.394,8.128 73.394,10.16
BOOT0: R27.2 U5.94 | length 11.6
  Top Layer w0.203: R27.2@36.285,12.192 v1(38.862,12.192) ; v1(38.862,16.256) 41.148,16.256 41.402,16.51 41.402,17.018 41.704,17.32 U5.94@43.05,17.32
  Bottom Layer w0.203: v1(38.862,12.192) v1(38.862,16.256)
BUZZER: R29.2 U5.82 | length 35.6
  Top Layer w0.203: R29.2@31.205,46.736 v1(33.274,46.736) ; v1(33.274,23.114) 35.467,23.114 35.673,23.32 U5.82@43.05,23.32
  Bottom Layer w0.203: v1(33.274,23.114) v1(33.274,46.736)
COM1: CN5.2 RL1.3 | length 27.4
  Bottom Layer w1.27: RL1.3@11.938,28.46 CN5.2@11.938,55.88